# Altium PCB Sensorboard.PcbDoc
Units mm, origin at the board's own origin, x right, y up, seen from the top; angles counter-clockwise.
Board outline 30.8 x 56.9 mm, 2 copper layers (Top Layer, Bottom Layer), stack 1.584 mm thick; 24 components, 21 nets, 134 pads, 22 vias.
Unrouted connection lines stored in the file: 2.
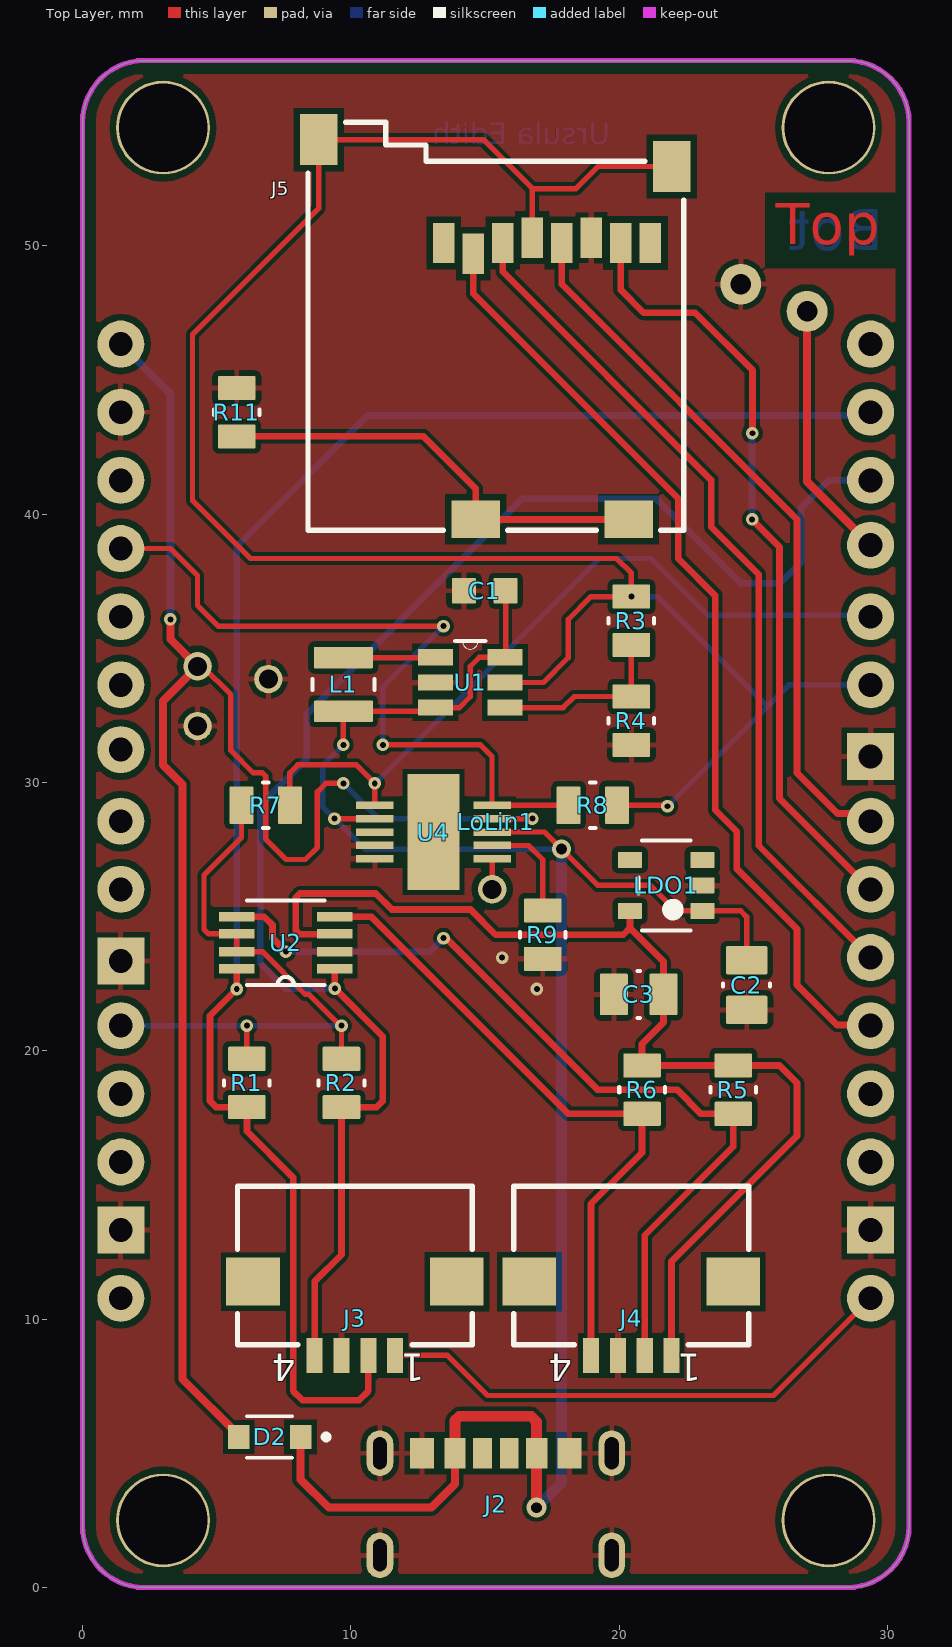
[diagram p0: Top Layer view]
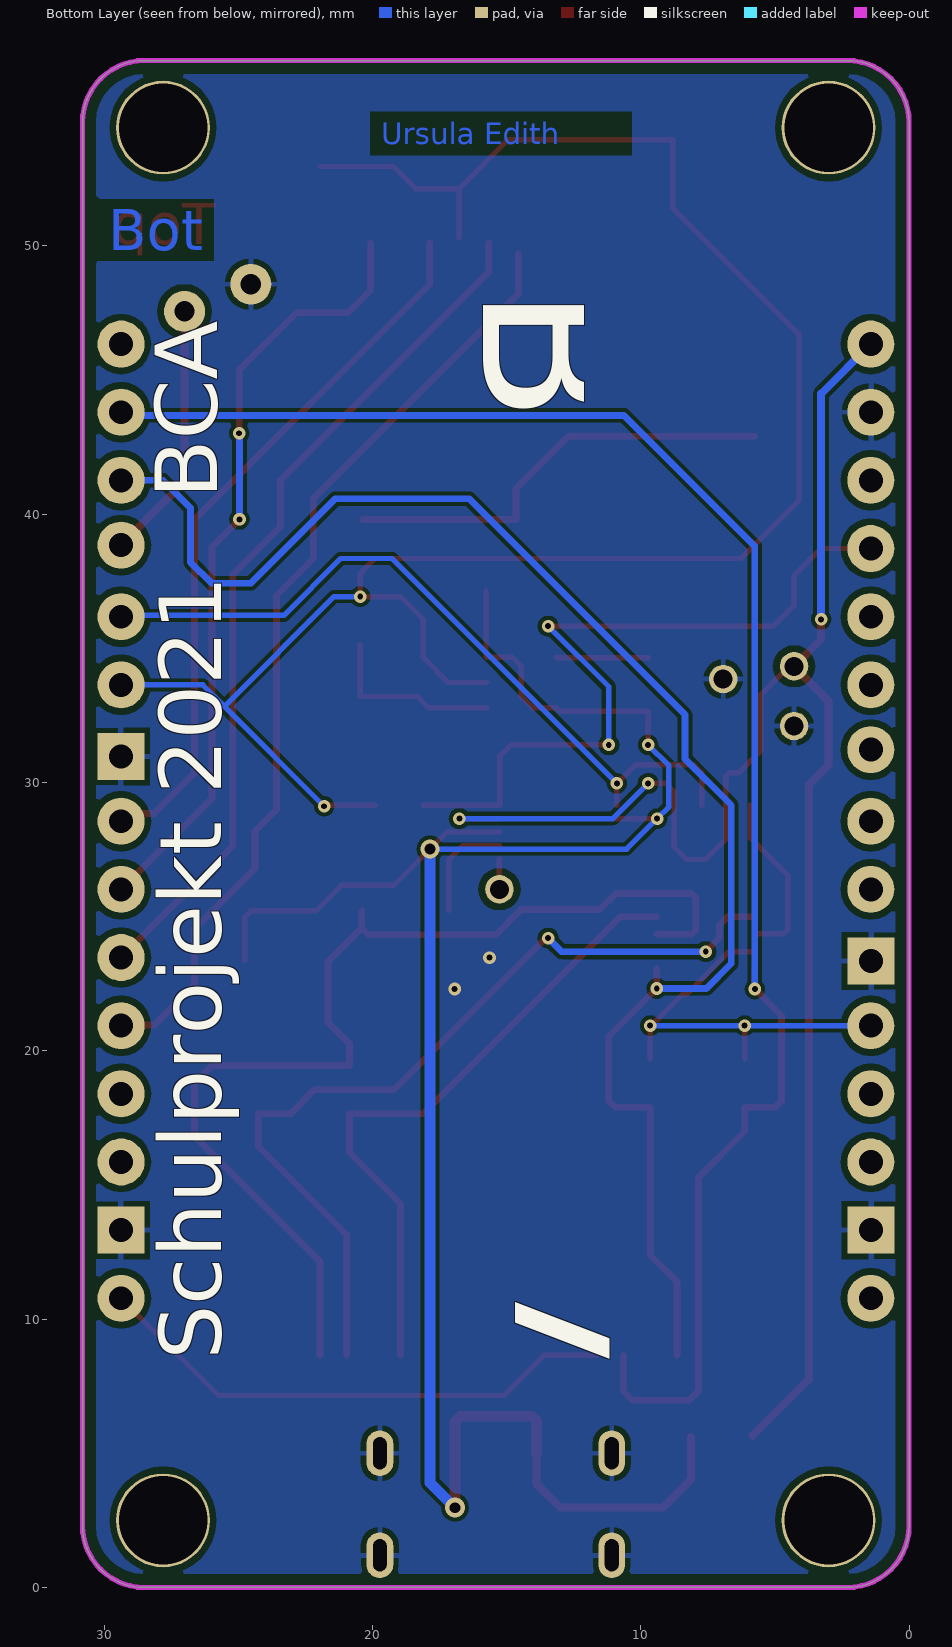
[diagram p1: Bottom Layer view, seen from below]
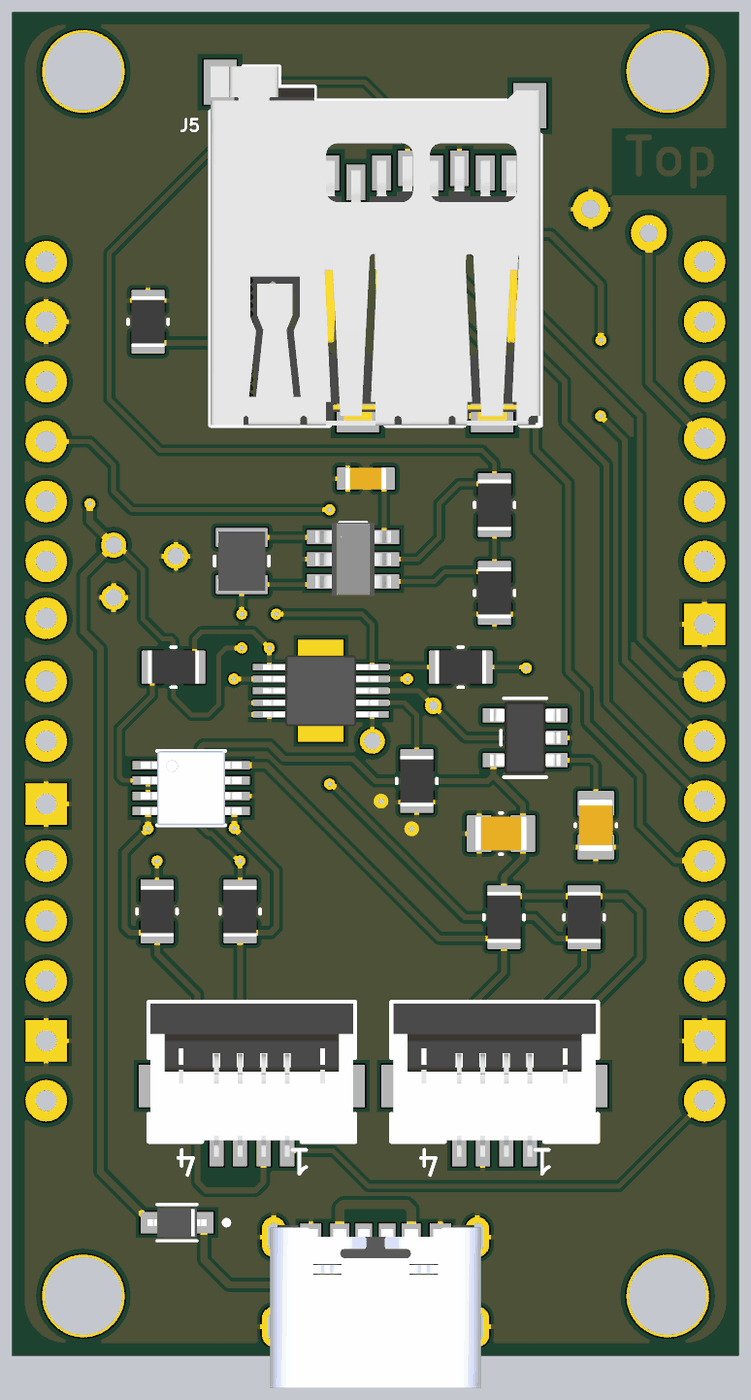
[diagram p2: 3D render of the assembled board from above, using the file's embedded part models]

## Layer stack, top to bottom
Top Solder: solder mask 0.01, Solder Resist, Dk 3.5
Top Layer: signal copper 0.035
Dielectric1: core 1.514, FR-4, Dk 4.8
Bottom Layer: signal copper 0.035
Bottom Solder: solder mask 0.01, Solder Resist, Dk 3.5

## Board outline
0,2.3 0,54.6 cw(c2.3,54.6) 2.3,56.9 2.297,56.9 28.5,56.9 cw(c28.5,54.6) 30.8,54.6 30.8,2.3 cw(c28.5,2.3) 28.5,0 2.297,0 2.3,0 cw(c2.3,2.3)

## Design rules (kind name [scope] priority, off if disabled: settings)
AssemblyTestPointUsage [All] p1: valid=2
Clearance Clearance_NPTH [PadIsPlated = 'false'] p1: gap=0.25 ignorepadtopadclearanceinfootprint=FALSE
Clearance "Clearance_J1 & J2" [InComponent('J1') or InComponent('J2') vs (OnLayer('Keep-Out Layer'))] p2: gap=0.1 ignorepadtopadclearanceinfootprint=FALSE except(0: Arc-Hole Track-Hole SMDPad-Hole THPad-Hole Via-Hole Fill-Hole Poly-Hole Region-Hole Text-Hole)
Clearance Clearance_Fiducial [HasFootprint('Fiducial_10')] p3: gap=0.5 ignorepadtopadclearanceinfootprint=FALSE except(0: Arc-Hole Track-Hole SMDPad-Hole THPad-Hole Via-Hole Fill-Hole Poly-Hole Region-Hole Text-Hole)
Clearance Clearance_keepout_to_component [All vs (OnLayer('Keep-Out Layer'))] p4: gap=0.4 ignorepadtopadclearanceinfootprint=FALSE
Clearance Clearance_All [All] p5: gap=0.15 ignorepadtopadclearanceinfootprint=FALSE except(0: Arc-Hole Track-Hole SMDPad-Hole THPad-Hole Via-Hole Fill-Hole Poly-Hole Region-Hole Text-Hole; 0.2: SMDPad-Poly; 0.25: THPad-Poly)
ComponentClearance [All] p1: gap=0.25 collisioncheckmode=3 verticalgap=0.25 showdistances=TRUE
DiffPairsRouting [All] p1: maxlimit=0.2 minlimit=0.2 mostfreqgap=0.2 toplayer_minwidth=0.381 toplayer_maxwidth=0.381 toplayer_prefwidth=0.381 bottomlayer_minwidth=0.381 bottomlayer_maxwidth=0.381 bottomlayer_prefwidth=0.381 maxuncoupledlength=12.7
FabricationTestPointUsage [All] p1: valid=2 allowmultiple=FALSE
HoleSize [All] p1: absolutevalues=TRUE maxlimit=25 minlimit=0.2 maxpercent=80.000 minpercent=20.000
HoleToHoleClearance [All] p1: gap=0.25 allowstackedmicrovias=TRUE
MinimumAnnularRing [All] p1: minimumring=0.1
MinimumSolderMaskSliver [All] p1: minsoldermaskwidth=0.1
PasteMaskExpansion PasteMaskExpansion_Fiducial [(InComponentClass('Fiducials'))] p1: expansion=-0.762
PasteMaskExpansion [All] p2: expansion=0
PlaneClearance [All] p1: clearance=0.4
PlaneConnect [All] p1: planeconnectstyle=Relief reliefexpansion=0.5 reliefentries=4 reliefconductorwidth=0.2 reliefairgap=0.2
PolygonConnect PolygonConnect_Via+MP [All vs IsVia OR HasFootprint('MP_10')] p1: connectstyle=Direct reliefconductorwidth=0.254 reliefentries=4 polygonreliefangle="90 Angle" airgapwidth=0.254
PolygonConnect [All] p2: connectstyle=Relief reliefconductorwidth=0.2 reliefentries=4 polygonreliefangle="90 Angle" airgapwidth=0.2
RoomDefinition Sensorboard [InComponentClass('Sensorboard')] p1: confinementstyle=ConfineIn formatcopy=TRUE lockcomponents=FALSE outline -56.65,-24.9 90.025,-24.9 90.025,89.725 -56.65,89.725
RoutingCorners [All] p1: cornerstyle=45-Degree minsetback=2 maxsetback=2
RoutingVias [All] p1: holewidth=0.22 width=0.47 viastyle="Through Hole" minholewidth=0.22 minwidth=0.47 maxholewidth=0.6 maxwidth=1
SilkToSilkClearance [All] p1: silktosilkclearance=0
SilkToSolderMaskClearance SilkscreenOverComponentPads [IsPad] p1: minsilkscreentomaskgap=0 clearancetoexposedcopper=TRUE
SolderMaskExpansion SolderMaskExpansion_Fiducials [(InComponentClass('Fiducials'))] p1: expansion=1 istentingtop=FALSE
SolderMaskExpansion SolderMaskExpansion_Vias [(IsVia)] p2: expansion=-0.1 istentingtop=FALSE
SolderMaskExpansion [All] p3: expansion=0.075 istentingtop=FALSE
Width [All] p1: maxlimit=10 minlimit=0.15 preferedwidth=0.25 minimp=50.000000 maximp=50.000000 favimp=50.000000
17 further rules are at their usual default settings.

## Components (designator, comment, footprint, x,y, rotation, side; value= is the part's Value field where it differs from the comment)
C1 "4u7" C_0603_B 14.989,37.141 r0 top
C2 "1u" C_0805_B 24.75,22.45 r90 top
C3 "1u" C_0805_B 20.725,22.1 r0 top
D2 "CUS520,H3F" DIO_CUS520,H3F 6.975,5.608 r180 top
J2 "UJC-HP-3-SMT-TR" CUI_UJC-HP-3-SMT-TR 15.4,5 r0 top
J3 "686104148922" "Flex Cable Connector WE 686104148922" 10.15,12 r180 top
J4 "686104148922" "Flex Cable Connector WE 686104148922" 20.45,12 r180 top
J5 "693071010811" "Micro SD Card WE 693071010811" 15.4,47 r180 top locked
L1 "4u7" L_1008_A 9.722,33.651 r90 top
LDO1 "MIC5504-1.8YM5-TR" SOT23-5 21.75,26.161 r90 top
LoLin1 "LoLin Interface" "LoLin NodeMcu V3" 1.425,10.775 r0 top locked
R1 "2k2" R_0805_A 6.125,18.8 r90 top
R2 "2k2" R_0805_A 9.65,18.8 r90 top
R3 "560k" R_0805_A 20.45,36.025 r90 top value=47k
R4 "330k" R_0805_A 20.45,32.3 r90 top value=47k
R5 "2k2" R_0805_A 24.25,18.55 r90 top
R6 "2k2" R_0805_A 20.85,18.55 r90 top
R7 "10k" R_0805_A 6.825,29.151 r180 top
R8 "10k" R_0805_A 19.011,29.151 r0 top
R9 "2k2" R_0805_A 17.15,24.325 r90 top
R11 "10k" R_0805_A 5.746,43.795 r270 top
U1 "MCP1640T-I/CHY" SOT95P270X145-6N 14.448,33.725 r0 top
U2 "TCA9406DCTR" SOP65P400X130-8N 7.575,24.025 r180 top
U4 "LTC1733EMSEPBF" MSOP-10_MSE 13.075,28.15 r0 top

## Footprints (in the part's own frame and the unit in brackets; to place one, negate y for a bottom-side part, rotate by r counter-clockwise, add the part's x,y. Pads: shape width x height; smd on the part's side, far side on the other; paste and mask are expansions set on the pad)
C_0603_B [mm] "Chip Capacitor, 2-Leads, Body 1.60x0.80mm, IPC High Density"
  rrect10% 0.9x0.95 smd: 1(-0.775,0) 2(0.775,0)
  body extent -0.87,-0.47 0.88,0.48, height 0.85
C_0805_B [mm] "Chip Capacitor, 2-Leads, Body 2.00x1.25mm"
  rrect10% 1.05x1.55 smd: 1(-0.925,0) 2(0.925,0)
  silkscreen extent -0.05,-0.87 0.05,0.87, body extent -1.1,-0.72 1.1,0.73, height 0.95
CUI_UJC-HP-3-SMT-TR [mm]
  rect 0.7x1.15 smd: A5(-0.5,0) B5(0.5,0)
  rect 0.8x1.15 smd: A9(1.52,0) B9(-1.52,0)
  rect 0.9x1.15 smd: A12(2.75,0) B12(-2.75,0)
  oval 1x1.7 hole 1.2 slot 0.51 at 0 deg: S1(-4.32,0) S2(4.32,0) S3(-4.32,-3.8) S4(4.32,-3.8)
  body extent -4.47,-6.4 4.47,0.5, height 3.26
DIO_CUS520,H3F [mm]
  rect 0.8x0.9 smd: A(1.15,0) C(-1.15,0)
  silkscreen extent -2.2,-0.77 0.85,0.77, body extent -1.25,-0.63 1.25,0.62, height 1.14
"Flex Cable Connector WE 686104148922" [mm] "ZIF Connectors, Horizontal, Bottom Contact Hinge Type, pitch 1mm, 4p"
  rect 0.6x1.3 smd: 1(-1.5,3.35) 2(-0.5,3.35) 3(0.5,3.35) 4(1.5,3.35)
  rect 2x1.8 smd: MP1(-3.8,0.6) MP2(3.8,0.6)
  silkscreen extent -4.38,-2.95 4.38,2.95, body extent -4.3,-2.9 4.3,3.6, height 2.27
L_1008_A [mm]
  rrect10% 0.8x2.2 smd: 1(-1,0) 2(1,0)
  silkscreen extent -0.2,-1.15 0.2,1.15, body extent -1.28,-1 1.28,1.01, height 1.25
"LoLin NodeMcu V3" [mil]
  round 69 hole 35: 3V3(0,400) 3V3(1100,0) 3V3(1100,900) A0(0,1400) CLK(0,600) CMD(0,805) D0(1100,1400) D1(1100,1300) D2(1100,1200) D3(1100,1105) D4(1100,1000) D5(1100,700) D6(1100,600) D7(1100,500) D8(1100,400) EN(0,300) GND(0,1300) RST(0,200) RX(1100,300) SD0(0,700) SD1(0,900) SD2(0,1000) SD3(0,1100) TX(1100,200) VIN(0,0) VUSB(0,1200)
  rect 69x69 hole 35: GND(0,100) GND(0,495) GND(1100,100) GND(1100,795)
"Micro SD Card WE 693071010811" [mm] "Micro SD Card Connector Push & Push - with Card Detection - 8 Pins"
  rect 0.8x1.5 smd: 1(1.94,-3.1) 2(0.84,-2.7) 3(-0.26,-3.1) 4(-1.36,-3.3) 5(-2.46,-3.1) 6(-3.56,-3.3) 7(-4.66,-3.1) 8(-5.76,-3.1)
  rect 1.4x1.9 smd: 9(-6.55,-5.95) 9(6.6,-6.95)
  rect 1.8x1.4 smd: 10(-4.95,7.2) 10(0.75,7.2)
  silkscreen extent -7,-7.6 7,7.6, body extent -7,-7.61 7,7.6, height 1.85
MSOP-10_MSE [mil]
  rect 55x11 smd mask+2.2: 1(-86,39.4) 2(-86,19.7) 3(-86,0) 4(-86,-19.7) 5(-86,-39.4) 6(86,-39.4) 7(86,-19.7) 8(86,0) 9(86,19.7) 10(86,39.4)
  rect 76x170 smd paste-78.74: ""(0,0)
  body extent -96,-59 96,59, height 42
R_0805_A [mm] "Chip Resistor, 2-Leads, Body 2.00x1.25mm, IPC High Density"
  rrect10% 0.9x1.4 smd: 1(-0.9,0) 2(0.9,0)
  silkscreen extent -0.1,-0.85 0.1,0.85, body extent -1.07,-0.7 1.08,0.7, height 0.65
SOP65P400X130-8N [mil]
  rect 52x14 smd: 1(-72,38) 2(-72,13) 3(-72,-13) 4(-72,-38) 5(72,-38) 6(72,-13) 7(72,13) 8(72,38)
  silkscreen extent -57,-62 57,62, body extent -84,-62 84,62, height 41
SOT23-5 [mm] "SOT-23-5"
  rrect10% 0.6x0.9 smd: 1(-0.95,-1.35) 2(0,-1.35) 3(0.95,-1.35) 4(0.95,1.35) 5(-0.95,1.35)
  silkscreen extent -1.68,-0.9 1.68,1.02, body extent -1.52,-1.5 1.53,1.5, height 1.45
SOT95P270X145-6N [mil]
  rect 52x23.62 smd: 1(-51,37) 2(-51,0) 3(-51,-37) 4(51,-37) 5(51,0) 6(51,37)
  silkscreen extent -22,49 22,61, body extent -63,-61 63,61, height 57

## Part data
C1: library part "302 672", "C 4.7uF 10% 16V X5R 0603", %=10, A=1, Assembly=SMD, C1=x, C2=1, C3=4, Component Type=Capacitor, ComponentLink1Description=Datasheet, ComponentLink1URL="\\vm-pizol\DATEN\Fabdaten\3xx xxx\30x xxx\302 xxx\302 6xx\302672", Cost=0.027500, Ea1=0.35, Ea2=x, Failure rate=2, Ieff=x, Imax=x, IrefImax=x, LatestRevisionDate=10.03.2017/MFL, LatestRevisionNote=Designator, Part Number="302 672", Pin Count=2, Pmax=x, Published=08.01.2016, Publisher=RKE, State=active, Tref=40, Umax=16V, UrefUmax=0.5
C2 C3: library part "301 379", "C 1uF 10% 10V X7R 0805", %=10, A=1, Assembly=SMD, C1=x, C2=1, C3=4, ComponentLink1Description=Datasheet, ComponentLink1URL="\\vm-pizol\DATEN\Fabdaten\3xx xxx\30x xxx\301 xxx\301 3xx\301379_C_1uF_10%_10V_X7R_0805", Component Type=Capacitor, Cost=0.007400, Ea1=0.35, Ea2=x, Failure rate=2, Ieff=x, Imax=x, IrefImax=x, Part Number="301 379", Pin Count=2, Pmax=x, Published=08.01.2016, Publisher=RKE, State=active, Tref=40, Umax=10V, UrefUmax=0.5
D2: "Diode Schottky 30V 200mA Surface Mount USC", Package="SOD-323 Toshiba", Availability=Unavailable, MF="Toshiba Semiconductor", MP=CUS520,H3F, Price=None, SnapEDA_Link=https://www.snapeda.com/parts/CUS520,H3F/Toshiba%20Semiconductor%20and%20Storage/view-part/638889/?ref=snap
J2: "Type C, 3 A, Right Angle, Surface Mount _SMT_, Power Only USB Receptacle", Package=Package, Availability=Unavailable, MF="CUI Devices", MP=UJC-HP-3-SMT-TR, Price=None, SnapEDA_Link=https://www.snapeda.com/parts/UJC-HP-3-SMT-TR/CUI%20Devices/view-part/4722774/?ref=snap
J3 J4: library part "Flex Cable Connector WE", "WR-FPC SMT ZIF Horizontal Bottom Contact Hinge Type, pitch 1mm, 4p", Contact Resistance=50mOhm, Operating Temperature="-25 to +85degC", Rated Current=1A, Working Voltage=100VAC, ComponentLink1Description=Manufacturer, ComponentLink1URL=http://www.we-online.de, ComponentLink2Description=Datasheet, ComponentLink2URL=https://katalog.we-online.com/em/datasheet/686104148922.pdf, Length=8.6mm, Mounting Technology=SMT, Packaging="Tape and Reel", Part Number=686104148922, Pin Number=4, Pitch=1mm, Published Date="November 2019", Publisher="Wurth Elektronik", Type=Horizontal
J5: library part "Micro SD Card WE", "WR-CRD Micro SD Card Connector Push & Push", Contact Resistance=100mOhm, Operating Temperature="-25 to +85degC", Rated Current=0.5A, Withstanding Voltage=500VAC, Working Voltage=100VAC, ComponentLink1Description=Manufacturer, ComponentLink1URL=http://www.we-online.de, ComponentLink2Description=Datasheet, ComponentLink2URL=https://katalog.we-online.com/em/datasheet/693071010811.pdf, Gender=Socket, Mounting Technology=SMT, Packaging="Tape and Reel", Part Number=693071010811, Pin Number=8, Published Date="November 2019", Publisher="Wurth Elektronik", Type="Push & Push"
L1: library part "303 158", "L 4u7 20% 1.5A", %=20, A=1, Assembly=SMD, C1=x, C2=x, C3=x, C4=x, C5=x, Component Type=Inductor, ComponentLink1Description=Datasheet, ComponentLink1URL="\\vm-pizol\DATEN\Fabdaten\3xx xxx\30x xxx\303 xxx\303 1xx\303158", Cost=0.042500, Ea1=0.06, Ea2=1.13, Failure rate=5, Ieff=x, Imax=1.5, IrefImax=x, Part Number="303 158", Pin Count=2, Pmax=x, Published=19.04.2017, Publisher=MFL, State=active, SW Count=x, Tref=55, Ueff=x, Umax=x, Uref=x, UrefUmax=x
LDO1: library part "LDO 5V to 3.3V", "Voltage Converter 5V to 3.3V MIC5504-3.3YM5-TR"
LoLin1: library part "NodeMCU V1.0 ESP-12E", "LoLin NodeMCU V3"
R1 R2 R5 R6 R9: library part "300 848", "R 2K2 5% 125mW 0805", %=5, A=0.87, Assembly=SMD, C1=x, C2=x, C3=x, C4=x, C5=x, ComponentLink1Description=Datasheet, ComponentLink1URL="\\vm-pizol\DATEN\Fabdaten\3xx xxx\30x xxx\300 xxx\300 8xx\300848_R_2K2_5%_125mW_0805", Component Type=Resistor, Cost=0.001900, Ea1=0.16, Ea2=0.44, Failure rate=0.2, Ieff=x, Imax=x, IrefImax=x, Part Number="300 848", Pin Count=2, Pmax=0.125, Published=28.04.2016, Publisher=MFL, State=active, SW Count=x, Tref=55, Ueff=x, Uref=x, UrefUmax=x
R3 R4: library part "300 084", "R 47K 5% 125mW 0805", %=5, A=0.87, Assembly=SMD, C1=x, C2=x, C3=x, C4=x, C5=x, Component Type=Resistor, ComponentLink1Description=Datasheet, ComponentLink1URL="\\vm-pizol\DATEN\Fabdaten\3xx xxx\30x xxx\300 xxx\300 0xx\300084_R_47K_5%_125mW_0805", Cost=0.001900, Ea1=0.16, Ea2=0.44, Failure rate=0.2, Ieff=x, Imax=x, IrefImax=x, Part Number="300 084", Pin Count=2, Pmax=0.125, Published=28.04.2016, Publisher=MFL, State=active, SW Count=x, Tref=55, Ueff=x, Uref=x, UrefUmax=x
R7 R8 R11: library part "300 080", "R 10K 1% 125mW 0805", %=1, A=0.87, Assembly=SMD, C1=x, C2=x, C3=x, C4=x, C5=x, Component Type=Resistor, ComponentLink1Description=Datasheet, ComponentLink1URL="\\vm-pizol\DATEN\Fabdaten\3xx xxx\30x xxx\300 xxx\300 0xx\300080_R_10K_1%_125mW_0805", Cost=0.001900, Ea1=0.16, Ea2=0.44, Failure rate=0.2, Ieff=x, Imax=x, IrefImax=x, Part Number="300 080", Pin Count=2, Pmax=0.125, Published=27.04.2016, Publisher=MFL, State=active, SW Count=x, Tref=55, Ueff=x, Uref=x, UrefUmax=x
U1: "Boost Switching Regulator IC Positive Adjustable 2V 1 Output 350mA SOT-23-6", Package="SOT-23-6 Microchip", Availability=Unavailable, MF=Microchip, MP=MCP1640T-I/CHY, Price=None, SnapEDA_Link=https://www.snapeda.com/parts/MCP1640T-I/CHY/Microchip/view-part/1037498/?ref=snap
U2: "2-Bit Bidirectional 1-MHz I2C Bus and SMBus Voltage-Level Shifter 8-SM8 -40 to 85", Package="SSOP-8 Texas Instruments", Availability=Unavailable, MF="Texas Instruments", MP=TCA9406DCTR, Price=None, SnapEDA_Link=https://www.snapeda.com/parts/TCA9406DCTR/Texas%20Instruments/view-part/105451/?ref=snap, Texas_Instruments-Purchase-URL=https://snapeda.com/shop?store=Texas+Instruments&id=105451
U4: "LTC1733 - Monolithic Linear Lithium-Ion Battery Charger with Thermal Regulation", Package="MSOP-10 Linear Technology", MF="Linear Technology/Analog", MP=LTC1733EMSE#PBF, SnapEDA_Link=https://www.snapeda.com/parts/LTC1733EMSE%23PBF/Analog%20Devices/view-part/340509/?ref=snap

## Free pads (board coordinates)
  round 3.5 hole 3.3: 2(3,2.5) 2(3,54.4) 2(27.8,2.5) 2(27.8,54.4)
  round 1.06 hole 0.71: 02(15.265,26.015) 04(4.285,34.325) 05(4.285,32.1) G(6.925,33.851)
  round 1.524 hole 0.762: 6(27,47.55) 7(24.529,48.565)

## Via types
v1: diameter 0.47, hole 0.22, Top Layer to Bottom Layer, 20 vias
v2: diameter 0.7, hole 0.4, Top Layer to Bottom Layer, 1 vias
v3: diameter 0.75, hole 0.4, Top Layer to Bottom Layer, 1 vias

## Nets (pads, with @x,y where several pads share a name; then routed paths per layer and width w, separated by ;. In a path a pad name is that pad's centre, name@x,y a point inside that pad or via, vN(x,y) a via of type N, cw(c..) or ccw(c..) an arc to the next point about the centre after c; other vN are vias at no path point)
1.8V: C3.2 J4.1 LDO1.5 R5.2 R6.2 U2.3 | length 40.7
  Top Layer w0.25: U2.3 9.39,24.341 8.096,24.341 7.95,24.488 7.95,25.715 8.096,25.861 10.926,25.861 11.526,25.261 14.457,25.261 15.393,24.325 20.15,24.325 20.4,24.575 ; LDO1.5 20.4,24.575 ; J4.1 21.95,12.15 26.625,16.825 26.625,18.8 25.975,19.45 R5.2 R6.2 20.85,20.25 21.65,21.05 C3.2 21.65,23.325 20.4,24.575
3.3V: J3.1 J5.4 J5.9 LoLin1.3V3 R1.2 R2.2 R3.2 R7.2 R8.2 U1.5 U2.6 U2.7 | length 117.5
  Top Layer w0.2: R7.2 5.925,27.945 4.525,26.545 4.525,24.525 4.695,24.355 U2.6 U2.7 6.705,23.695 8.3,22.1 8.437,22.1 9.602,20.935 v1(9.65,20.935) R2.2 ; R1.2 v1(6.125,20.935) ; J3.1 13.6,8.65 15.096,7.153 25.743,7.153 LoLin1.3V3@29.365,10.775 ; U1.5 17.175,33.725 18.1,34.65 18.1,36.075 18.95,36.925 v1(20.45,36.925) 20.45,37.8 19.905,38.345 6.255,38.345 4.1,40.5 4.1,46.694 8.8,51.394 8.8,53.95 14.935,53.95 16.76,52.125 ; J5.4 16.76,52.125 ; R8.2 21.758,29.151 v1(21.797,29.112) ; J5.9@21.95,52.95 19.211,52.95 18.386,52.125 16.76,52.125
  Bottom Layer w0.2: LoLin1.3V3@1.425,20.935 v1(6.125,20.935) v1(9.65,20.935) ; v1(20.45,36.925) 21.425,36.925 25.518,32.832 ; v1(21.797,29.112) 25.518,32.832 ; LoLin1.3V3@29.365,33.635 26.321,33.635 25.518,32.832
5V: C1.2 C2.2 D2.C J2.A9 J2.B9 L1.1 LDO1.1 U1.3 U1.6 U4.2 U4.8 | length 79.2
  Top Layer w0.2: v1(9.39,28.65) U4.2 ; v1(9.722,31.4) L1.1 13.019,32.651 U1.3 14.04,32.785 14.448,33.193 14.448,34.325 14.788,34.665 U1.6 15.764,34.686 C1.2 ; U4.8 17.215,28.15 v2(17.85,27.515) 19.204,26.161 21.16,26.161 22.11,25.211 LDO1.1 24.529,25.211 24.75,24.99 C2.2
  Top Layer w0.3: D2.C 8.125,4.025 9.175,2.975 13,2.975 13.88,3.855 J2.B9
  Top Layer w0.4: J2.B9 13.88,6.218 14.04,6.378 16.717,6.378 16.92,6.175 J2.A9 v3(16.92,2.975)
  Bottom Layer w0.2: v1(9.722,31.4) 8.95,30.628 8.95,29.09 v1(9.39,28.65) 10.525,27.515 v2(17.85,27.515)
  Bottom Layer w0.4: v3(16.92,2.975) 17.85,3.905 v2(17.85,27.515)
BAT_CHG: D2.A LoLin1.A0 pad.04 U4.9 | length 66.1
  Top Layer w0.2: pad.04 4.475,34.325 5.525,33.275 5.525,31.189 6.361,30.353 6.708,30.353 6.825,30.236 6.825,27.889 7.589,27.125 8.3,27.125 8.75,27.575 8.75,29.65 9.063,29.963 v1(9.722,29.963) ; D2.A D2.A@5.825,5.658 ; U4.9 v1(16.76,28.65)
  Top Layer w0.3: v1(3.275,36.075) 3.275,35.335 pad.04 3,33.04 3,30.653 3.725,29.928 3.725,7.758 D2.A@5.825,5.658
  Bottom Layer w0.2: v1(9.722,29.963) 11.035,28.65 v1(16.76,28.65)
  Bottom Layer w0.3: LoLin1.A0 3.275,44.485 v1(3.275,36.075)
BAT_NTC: pad.02 U4.6 | length 1.1
  Top Layer w0.2: U4.6 15.265,27.144 pad.02
CARD_DETECT: J5.10 R11.2 | length 16.6
  Top Layer w0.25: R11.2 12.705,42.895 14.65,40.95 14.65,39.8 J5.10@20.35,39.8
CHG_STAT: LoLin1.D4 R7.1 U4.1 | length 28.4
  Top Layer w0.2: R7.1 7.725,30.353 8.025,30.653 10.201,30.653 v1(10.891,29.963) U4.1
  Bottom Layer w0.2: v1(10.891,29.963) 19.272,38.345 21.18,38.345 23.3,36.225 29.315,36.225 LoLin1.D4
GND: C1.1 C2.1 C3.1 J2.A12 J2.B12 J2.S1 J2.S2 J2.S3 J2.S4 J3.3 J4.3 J5.6 LDO1.2 LoLin1.GND pad.05 pad.7 pad.G R4.1 R9.1 R11.1 U1.2 U2.2 U4.4 U4.5 | length 0.1
  Bottom Layer w0.25: v1@15.515,23.43 15.592,23.43 v1(15.634,23.473)
  other v1: 16.933,22.3
HCS: J5.2 LoLin1.D8 | length 35.6
  Top Layer w0.25: J5.2 14.56,48.215 22.2,40.575 22.2,38.345 23.575,36.97 23.575,28.981 24.375,28.181 24.375,26.79 26.625,24.54 26.625,22.45 28.114,20.962 29.338,20.962 LoLin1.D8
HMISO: J5.7 LoLin1.D6 | length 29.1
  Top Layer w0.25: J5.7 20.06,48.35 20.91,47.5 22.825,47.5 24.963,45.363 v1(24.963,43.012) ; v1(24.95,39.8) 25.975,38.775 25.975,29.405 LoLin1.D6
  Bottom Layer w0.25: v1(24.95,39.8) 24.95,43 v1(24.963,43.012)
HMOSI: J5.3 LoLin1.D7 | length 32.3
  Top Layer w0.25: J5.3 15.66,49.04 23.425,41.275 23.425,39.525 25.2,37.75 25.2,27.64 LoLin1.D7
HSCLK: J5.5 LoLin1.D5 | length 26.9
  Top Layer w0.25: J5.5 17.86,48.565 26.625,39.8 26.625,30.353 28.136,28.843 29.077,28.843 LoLin1.D5
LED1: LoLin1.D3 pad.6 | length 9.7
  Top Layer w0.3: pad.6 27,41.207 LoLin1.D3
NetL1_2: L1.2 U1.1 | length 3.4
  Top Layer w0.2: L1.2 13.139,34.651 U1.1
NetR3_1: R3.1 R4.2 U1.4 | length 6.8
  Top Layer w0.2: U1.4 17.91,32.785 18.325,33.2 R4.2 R3.1
NetR9_2: R9.2 U4.7 | length 4
  Top Layer w0.2: U4.7 16.625,27.65 17.15,27.125 R9.2
PSU_STAT: LoLin1.SD3 R8.1 U4.10 | length 28.2
  Top Layer w0.2: LoLin1.SD3 3.275,38.715 4.285,37.705 4.285,36.591 5.052,35.825 v1(13.45,35.825) ; v1(11.189,31.4) 14.827,31.4 15.259,30.968 U4.10 R8.1
  Bottom Layer w0.2: v1(11.189,31.4) 11.189,33.564 v1(13.45,35.825)
SCL_1.8V: J4.2 R5.1 U2.5 | length 32.6
  Top Layer w0.25: U2.5 6.771,24.99 7.075,24.686 7.075,24.195 v1(7.575,23.695) ; v1(13.45,24.195) 13.541,24.195 19.185,18.55 22.15,18.55 23.05,17.65 R5.1 24.25,16.425 20.95,13.125 J4.2
  Bottom Layer w0.25: v1(7.575,23.695) 12.95,23.695 v1(13.45,24.195)
SCL_3.3V: J3.2 LoLin1.D1 R1.1 U2.8 | length 64.7
  Top Layer w0.25: U2.8 v1(5.746,22.3) 4.75,21.304 4.75,18.125 4.975,17.9 R1.1 6.125,17 7.85,15.275 7.85,7.325 8.2,6.975 10.3,6.975 10.65,7.325 J3.2
  Bottom Layer w0.25: v1(5.746,22.3) 5.746,38.796 10.625,43.675 29.245,43.675 LoLin1.D1
SDA_1.8V: J4.4 R6.1 U2.4 | length 24.3
  Top Layer w0.25: U2.4 10.767,24.99 18.108,17.65 R6.1 20.85,16.2 18.95,14.3 J4.4
SDA_3.3V: J3.4 LoLin1.D2 R2.1 U2.1 | length 58.6
  Top Layer w0.25: J3.4 8.65,11.4 9.65,12.4 R2.1 10.964,17.9 11.189,18.125 11.189,20.536 v1(9.404,22.321) U2.1
  Bottom Layer w0.25: v1(9.404,22.321) 7.554,22.321 6.625,23.25 6.625,29.151 8.35,30.876 8.35,32.525 16.4,40.575 21.375,40.575 24.525,37.425 26,37.425 26.775,38.2 26.775,40.225 27.805,41.255 LoLin1.D2
pads on no net: J2.A5 J2.B5 J3.MP1 J3.MP2 J4.MP1 J4.MP2 J5.1 J5.8 LDO1.3 LDO1.4 LoLin1.CLK LoLin1.CMD LoLin1.D0 LoLin1.EN LoLin1.RST LoLin1.RX LoLin1.SD0 LoLin1.SD1 LoLin1.SD2 LoLin1.TX LoLin1.VIN LoLin1.VUSB U4. U4.3

## Polygon pours and split planes (outlines as drawn)
GND on Bottom Layer "GNDpol2" (solid, pour order 8): 0,56.9 30.8,56.9 30.8,0 0,0
GND on Top Layer "GNDpol" (solid, pour order 7): 0,56.9 30.8,56.9 30.8,0 0,0

## Keep-outs
Keep-Out Layer:
  lines w0.2: 2.297,0 28.5,0 ccw(c28.5,2.3) 30.8,2.3 30.8,54.6 ccw(c28.5,54.6) 28.5,56.9 2.297,56.9 ; 2.3,0 cw(c2.3,2.3) 0,2.3 0,54.6 cw(c2.3,54.6) 2.3,56.9

## Other copper
Top Layer:
  text "Top" at 25.825,50.062 h1.52
Bottom Layer:
  text "Ursula Edith" at 19.671,53.779 h0.8
  text "Bot" at 29.846,49.829 h1.52

## Silkscreen, mask and mechanical layers (free items; w line width, h text height)
Bottom Overlay:
  text "B" at 19.646,48.5 h20 r90
  text "BCA" at 25.019,40.571 h4 r270
  text "Schulprojekt 2021" at 24.863,8.486 h4 r270
  text "7" at 7.375,7.15 h20 r270
Geometry PCB:
  lines w0.254: 2.297,0 28.5,0 ccw(c28.5,2.3) 30.8,2.3 30.8,54.6 ccw(c28.5,54.6) 28.5,56.9 2.297,56.9 ; 2.3,0 cw(c2.3,2.3) 0,2.3 0,54.6 cw(c2.3,54.6) 2.3,56.9
Bottom Designator:
  circle w0.2: c6.825,38.345 r0.1

## Text inside footprints (layer, text, board x,y; h text height)
J3: Top Overlay "4" at 7.95,8.7 h1.02 r180; Top Overlay "1" at 12.75,8.7 h1.02 r180
J4: Top Overlay "4" at 18.25,8.7 h1.02 r180; Top Overlay "1" at 23.05,8.7 h1.02 r180